# Altium PCB PCB1.PcbDoc
Units mm, origin at the board's own origin, x right, y up, seen from the top; angles counter-clockwise.
Board outline 28.83 x 28.83 mm, 2 copper layers (Top Layer, Bottom Layer); 5 components, 7 nets, 28 pads, 6 vias.
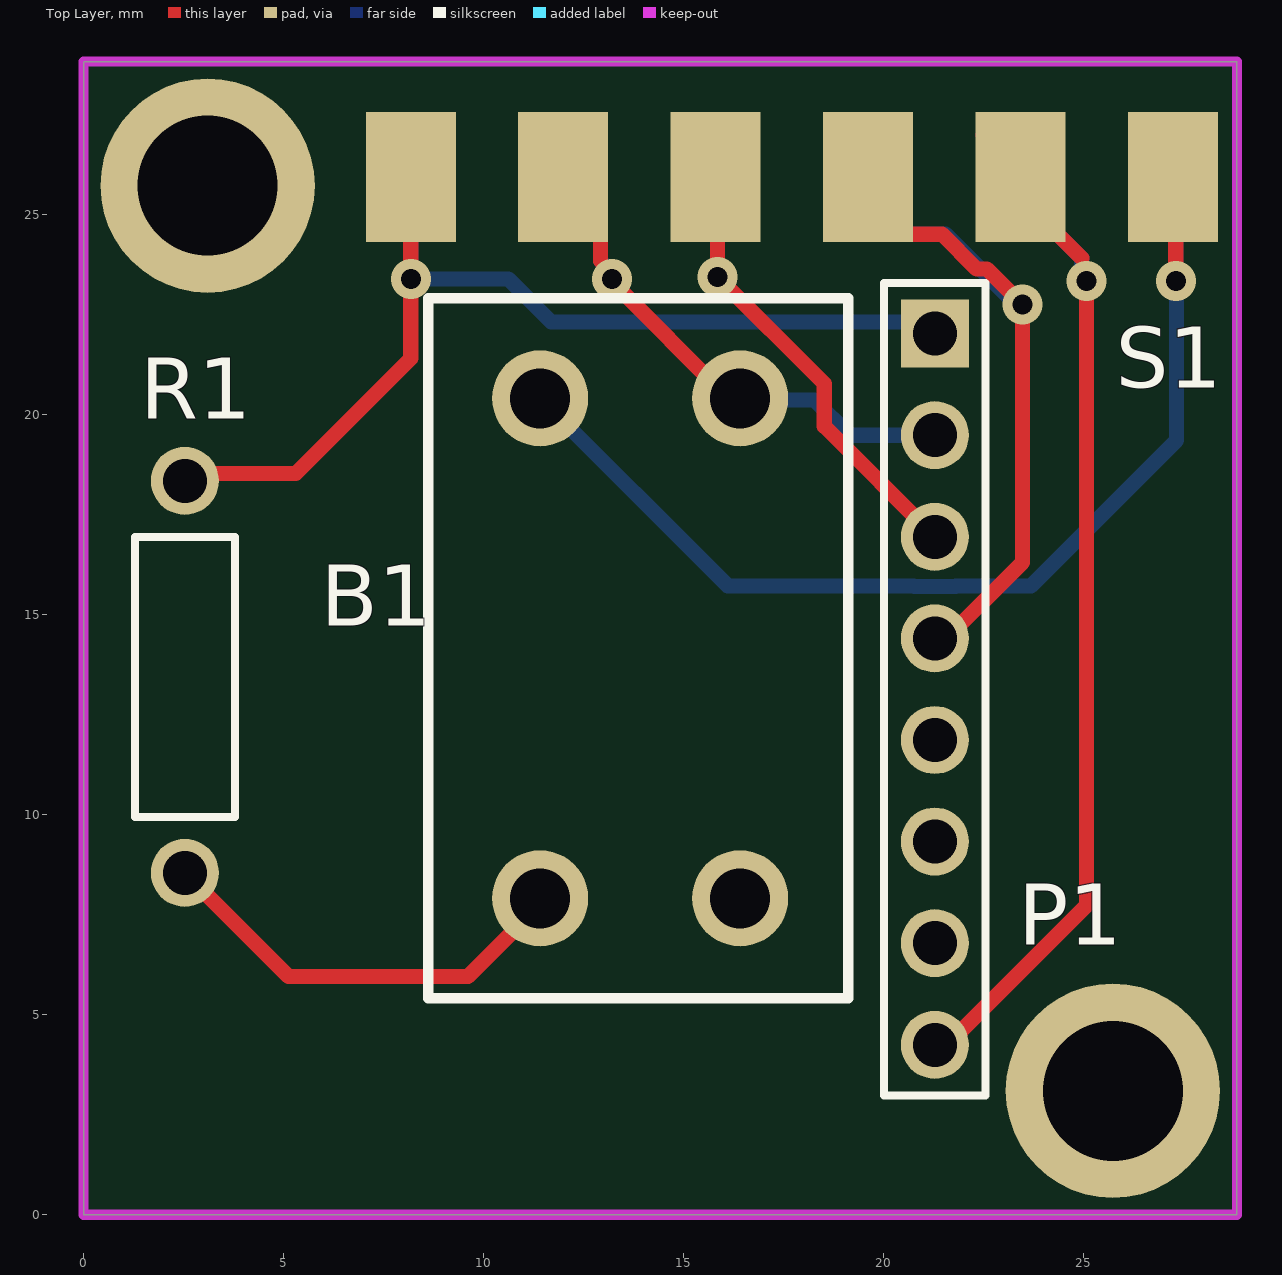
[diagram p0: Top Layer view]
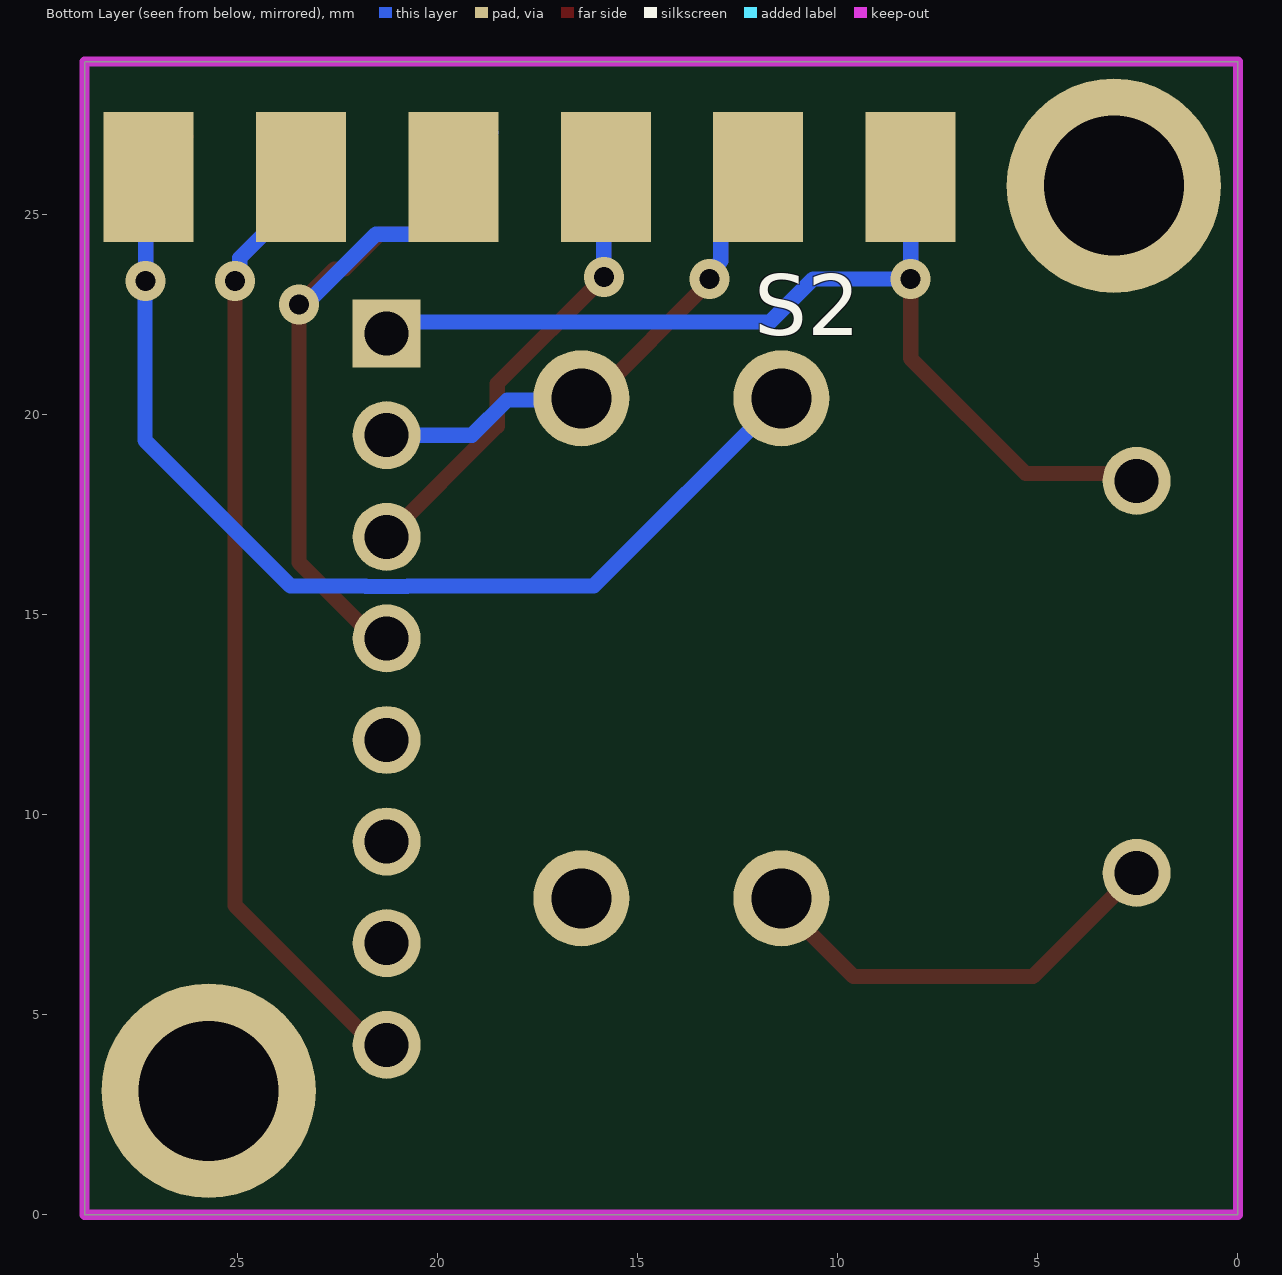
[diagram p1: Bottom Layer view, seen from below]

## Layer stack, top to bottom
Top Solder: solder mask 0.0102, Solder Resist, Dk 3.5
Top Layer: signal copper 0.0356
Dielectric 1: dielectric 0.32, FR-4, Dk 4.8
Bottom Layer: signal copper 0.0356
Bottom Solder: solder mask 0.0102, Solder Resist, Dk 3.5

## Board outline
0,0 0,28.829 28.83,28.829 28.83,0 28.827,0

## Design rules (kind name [scope] priority, off if disabled: settings)
BoardOutlineClearance [All] p1: gap=0.2 ignorepadtopadclearanceinfootprint=FALSE except(0.4: Arc-SplitBarrior Arc-SplitContinuation Track-SplitBarrior Track-SplitContinuation SMDPad-SplitBarrior SMDPad-SplitContinuation THPad-SplitBarrior THPad-SplitContinuation Via-SplitBarrior Via-SplitContinuation Fill-SplitBarrior Fill-SplitContinuation Poly-SplitBarrior Poly-SplitContinuation Region-SplitBarrior Region-SplitContinuation Text-SplitBarrior Text-SplitContinuation)
Clearance "Clearance Bottom Layer" [OnLayer('Bottom Layer')] p1: gap=0.203 ignorepadtopadclearanceinfootprint=TRUE except(0.254: Arc-Text Track-Text SMDPad-Text THPad-Text Via-Text Fill-Text Poly-Text Region-Text Text-Text)
Clearance "Clearance Top Layer" [OnLayer('Top Layer')] p2: gap=0.203 ignorepadtopadclearanceinfootprint=TRUE except(0.254: Arc-Text Track-Text SMDPad-Text THPad-Text Via-Text Fill-Text Poly-Text Region-Text Text-Text)
Clearance [All] p3: gap=0.2 ignorepadtopadclearanceinfootprint=FALSE except(0.089: Arc-Arc Arc-Track Arc-SMDPad Track-Track Track-SMDPad SMDPad-SMDPad; 0.127: Arc-Via Track-Via SMDPad-Via THPad-Via Via-Via; 0.254: Arc-Text Track-Text SMDPad-Text THPad-Text Via-Text Fill-Text Poly-Text Region-Text Text-Text)
HoleSize [All] p1: absolutevalues=TRUE maxlimit=6.3 minlimit=0.2 maxpercent=80.000 minpercent=20.000
MinimumAnnularRing [All] p1: minimumring=0.076
MinimumSolderMaskSliver [All] p1: minsoldermaskwidth=0.1
PolygonConnect PolygonConnect_1 [All] p1: thpad.connectstyle=Relief thpad.reliefconductorwidth=0.508 thpad.reliefentries=4 thpad.polygonreliefangle="90 Angle" thpad.airgapwidth=0.254 smdpad.connectstyle=Relief smdpad.reliefconductorwidth=0.508 smdpad.reliefentries=4 smdpad.polygonreliefangle="90 Angle" smdpad.airgapwidth=0.254 via.connectstyle=Direct via.reliefconductorwidth=0.508 via.reliefentries=4 via.polygonreliefangle="90 Angle" via.airgapwidth=0.254
RoutingCorners [All] p1: cornerstyle=Round minsetback=2.54 maxsetback=2.54
RoutingVias [All] p1: holewidth=0.5 width=1 viastyle="Through Hole" minholewidth=0.2 minwidth=0.45 maxholewidth=1 maxwidth=2
SilkToSilkClearance [All] p1: silktosilkclearance=0.1
SilkToSolderMaskClearance [IsPad] p1: minsilkscreentomaskgap=0.1 clearancetoexposedcopper=TRUE
SolderMaskExpansion [All] p1: expansion=0.102 istentingtop=FALSE
Width [All] p1: maxlimit=2.54 minlimit=0.089 preferedwidth=0.381
25 further rules are at their usual default settings.

## Components (designator, comment, footprint, x,y, rotation, side; value= is the part's Value field where it differs from the comment)
B1 "Component_1" PCBComponent_1#1 14.413,14.413 r90 top
P1 "Header 8" HDR1X8 21.28,22.03 r270 top
R1 "" OMTE-RES7X2.5-2 2.53,13.45 r90 top
S1 "" PCBComponent_1#2 6.91,24.172 r0 top
S2 "" PCBComponent_1#2 6.91,27.728 r0 bottom

## Footprints (in the part's own frame and the unit in brackets; to place one, negate y for a bottom-side part, rotate by r counter-clockwise, add the part's x,y. Pads: shape width x height; smd on the part's side, far side on the other; paste and mask are expansions set on the pad)
HDR1X8 [mm] "Connector; Header; 8 Position"
  rect 1.7x1.7 hole 1.1: 1(0,0)
  round 1.7 hole 1.1: 2(2.54,0) 3(5.08,0) 4(7.62,0) 5(10.16,0) 6(12.7,0) 7(15.24,0) 8(17.78,0)
  silkscreen extent -1.27,-1.27 19.05,1.27
OMTE-RES7X2.5-2 [mm] "Resistor, Axial; Body 7x2.5mm, Lead Dia. 0.6mm"
  round 1.7 hole 1.1: 1(-4.9,0) 2(4.9,0)
  silkscreen extent -3.5,-1.25 3.5,1.25, body extent -3.5,-1.25 3.5,1.25, height 2.5
PCBComponent_1#1 [mm]
  round 2.4 hole 1.5: 1(-6.5,3) 2(6,3) 3(-6.5,-2) 4(6,-2)
  silkscreen extent -9,-4.7 8.5,5.8
PCBComponent_1#2 [mm]
  rect 2.25x3.25 smd: 1(1.27,1.778) 2(5.08,1.778) 3(8.89,1.778) 4(12.7,1.778) 5(16.51,1.778) 6(20.32,1.778)

## Part data
P1: "Header, 8-Pin", LatestRevisionDate=17-Jul-2002, LatestRevisionNote="Re-released for DXP Platform.", Publisher="Altium Limited"
R1: library part CMP-2000-06865-1, "Little Demon(R) Carbon Composition Molded OD Series, 250 V, 10 KOhm, +/-5%, -70 to 130 degC, 2-Pin THD, RoHS, Bulk", Manufacturer=Ohmite, Operating Temperature=-, Package / Case=Axial, Package Description="2-Pin THD Resistor, Body 7 x 2.5 mm, Lead Dia. 0.6 mm", Package Reference=RES7X2.5, PartNumber=OD103JE, Power (Watts)=0.25W,1/4W, Power Rating=0.25W, Resistance (Ohms)=10k, Standard Package=100, Tolerance=±5%, Catalog Drawings=OD,OF,OASeries, Category=Resistors, Composition=CarbonComposition, Datasheet URL=http://www.ohmite.com/cat/res_od_of_oa.pdf, Datasheet Version=06/2016, EDA / CAD Models=DownloadfromAcceleratedDesigns, Family=ThroughHoleResistors, Features=PulseWithstanding, Height=-, Manufacturer URL=http://www.ohmite.com/, Mounting Technology=ThroughHole, Number of Terminations=2, Online Catalog=OD,OF,OASeries,LittleDemon®, Packaging=Bulk, RoHS Information="LittleDemon\"E\"SeriesMaterialDeclaration", Series=LittleDemon®OD, Size / Dimension="0.098\"Diax0.276\"L(2.50mmx7.00mm)", Supplier Device Package=Axial, Temperature Coefficient=-
S1 S2: library part Component_1

## Free pads (board coordinates)
  round 5.36 hole 3.5: 1(3.1,25.729) 4(25.73,3.1)

## Via types
v1: diameter 1, hole 0.5, Top Layer to Bottom Layer, 6 vias

## Nets (pads, with @x,y where several pads share a name; then routed paths per layer and width w, separated by ;. In a path a pad name is that pad's centre, name@x,y a point inside that pad or via, vN(x,y) a via of type N, cw(c..) or ccw(c..) an arc to the next point about the centre after c; other vN are vias at no path point)
+5: P1.1 R1.2 S1.1 S2.1 | length 26.9
  Top Layer w0.381: R1.2 2.715,18.535 5.302,18.535 8.179,21.412 v1(8.179,23.393) 8.179,25.949 S1.1
  Bottom Layer w0.381: S2.1 8.179,25.949 v1(8.179,23.393) 10.617,23.393 11.691,22.32 P1.1@20.6,22.32
GND: B1.4 P1.2 S1.2 S2.2 | length 14.8
  Top Layer w0.381: S1.2 12.925,25.015 12.925,23.844 ; v1(13.208,23.393) 13.208,23.328 16.1,20.436 B1.4@16.1,20.37
  Bottom Layer w0.381: S2.2 12.925,25.015 12.925,23.844 13.208,23.561 v1(13.208,23.393) ; B1.4@16.646,20.37 18.265,20.37 19.145,19.49 P1.2
NetB1_1: B1.1 R1.1 | length 10.3
  Top Layer w0.381: R1.1 5.12,5.96 9.609,5.96 B1.1@11.133,7.484
NetB1_2: B1.2 S1.6 S2.6 | length 30
  Top Layer w0.381: S1.6@26.295,26.96 27.23,26.025 S1.6 27.305,25.875 v1(27.305,23.343)
  Bottom Layer w0.381: B1.2 16.104,15.723 20.749,15.723 20.765,15.706 21.795,15.706 21.811,15.723 23.683,15.723 27.321,19.361 27.321,23.326 v1(27.305,23.343) 27.305,25.875 S2.6
NetP1_3: P1.3 S1.3 S2.3 | length 13.8
  Top Layer w0.381: S1.3 15.85,25.9 v1(15.85,23.444) 18.517,20.777 18.517,19.713 P1.3
  Bottom Layer w0.381: S2.3 15.85,25.9 v1(15.85,23.444)
NetP1_4: P1.4 S1.4 S2.4 | length 22.3
  Top Layer w0.381: S1.4@19.228,25.568 S1.4 19.61,25.45 20.545,24.516 21.458,24.516 22.327,23.647 22.581,23.647 v1(23.47,22.758) 23.47,16.307 P1.4@21.428,14.266
  Bottom Layer w0.381: S2.4@18.675,27.06 19.61,26.125 S2.4 19.61,25.45 20.545,24.516 21.548,24.516 23.305,22.758 v1(23.47,22.758)
NetP1_8: P1.8 S1.5 S2.5 | length 29.6
  Top Layer w0.381: P1.8@21.342,4.002 21.342,4.01 21.981,4.648 21.988,4.648 25.07,7.73 v1(25.07,23.343) ; S1.5@22.485,27 S1.5@23.42,26.065 ; S1.5 23.42,25.45 24.951,23.919
  Bottom Layer w0.381: S2.5@22.485,27 23.42,26.065 S2.5 23.42,25.45 24.951,23.919 24.951,23.461 v1(25.07,23.343)
pads on no net: B1.3 P1.5 P1.6 P1.7

## Keep-outs
Keep-Out Layer:
  lines w0.254: 28.827,0 0,0 0,28.829 28.83,28.829 28.83,0